# Allegro board 4CH-OEI-A1.brd
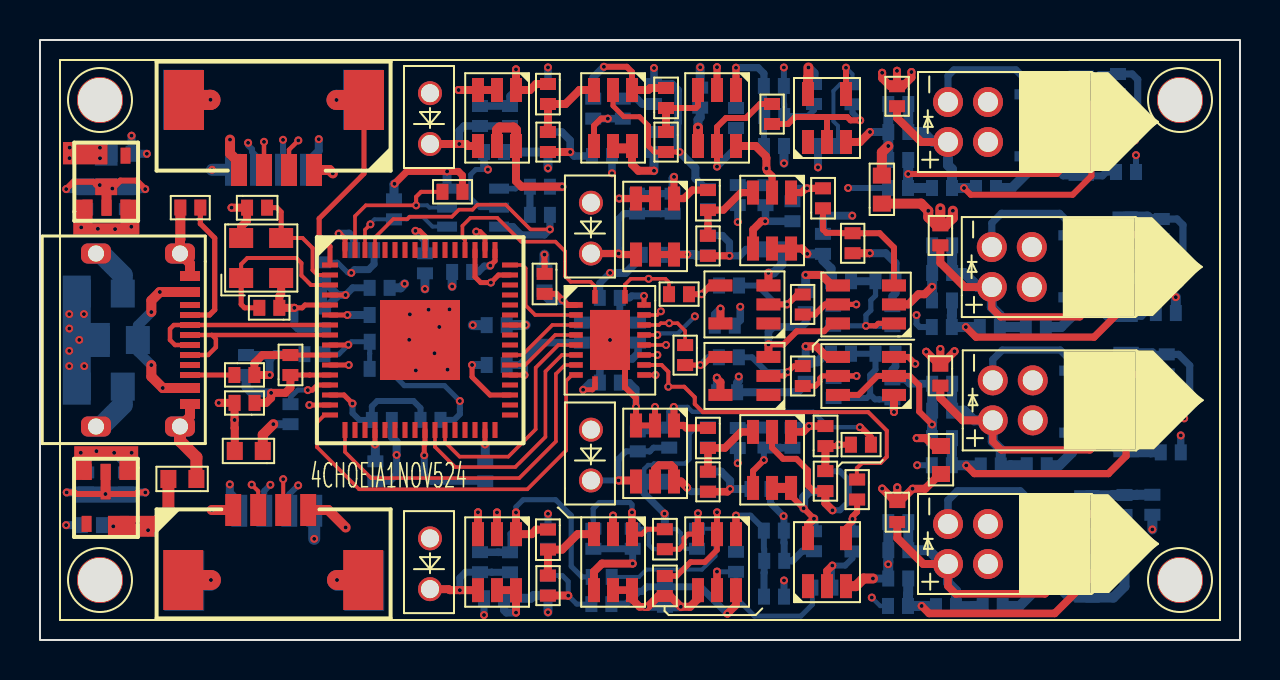
[diagram p0: board, top side]
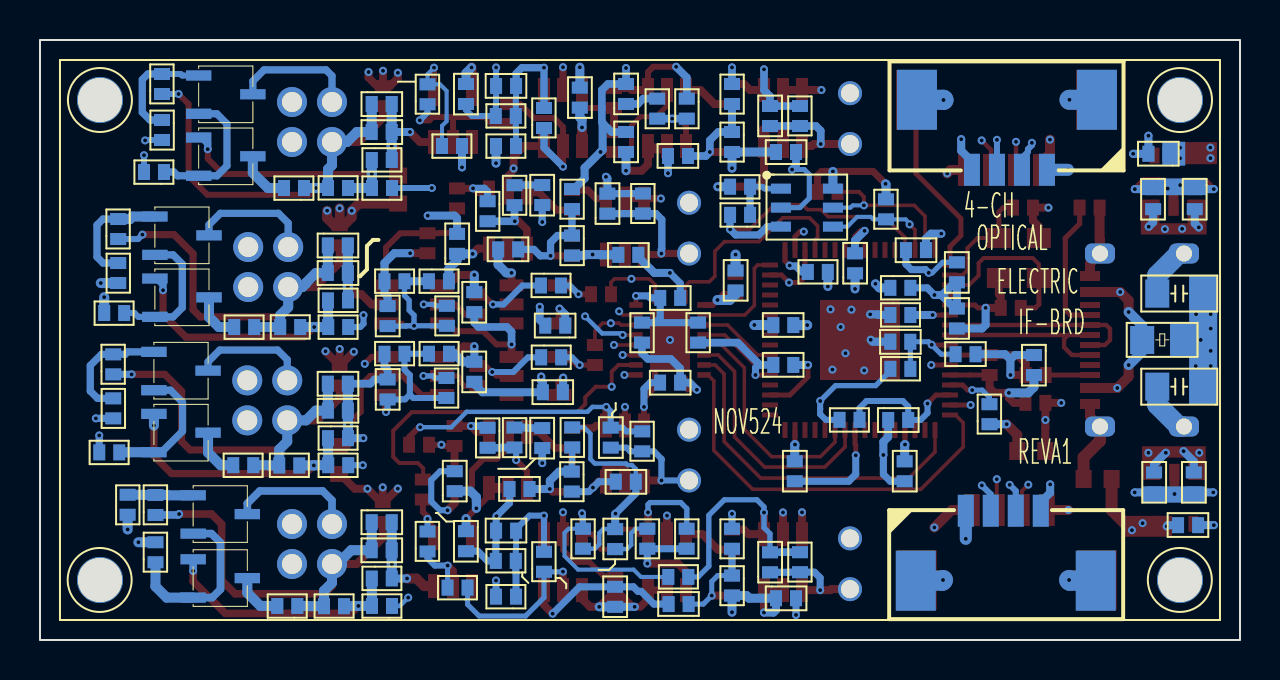
[diagram p1: board, bottom side, seen from below]

Outline 60 x 30 mm; copper layers: TOP, GND, VCC, BOTTOM. Coordinates in mm from the lower left corner of the outline.
Outline path: rectangle 0,0 60,30

## Design rules (mm)
constraint set DEFAULT: min track width 0.127
net group TXD_A: nets N931488 N931856 N931860 N931892 TXD_A
net group TXD_B: nets N932344 N932712 N932716 N932748 TXD_B
net group TXD_C: nets N932356 N932732 N932736 N932752 TXD_C
net group TXD_D: nets N931500 N931876 N931880 N931896 TXD_D

## Placement (name value [footprint] x y rotation side)
C1  0.1uF  [C0402_SMT]  25.4 27.8 270 top
C2  0.1uF  [C0402_SMT]  31.3 26.6 90 top
C3  0.1uF  [C0402_SMT]  39.15 21.58 90 top
C4  0.1uF  [C0402_SMT]  33.4 22.5 270 top
C5  27pF  [C0402_SMT]  10.35 21.62 0 top
C6  27pF  [C0402_SMT]  11.96 16.61 180 top
C7  4.7uF  [C0402_SMT]  12.52 13.25 90 top
C8  0.1uF  [C0402_SMT]  39.27 9.7 90 top
C9  0.1uF  [C0402_SMT]  33.4 10.6 270 top
C10  0.1uF  [C0402_SMT]  31.24 4.54 90 top
C11  0.1uF  [C0402_SMT]  25.4 5.52 270 top
C12  0.1uF  [C0402_SMT]  31.24 2.2 90 top
C13  0.1uF  [C0402_SMT]  36.2 27.7 0 bottom
C14  0.1uF  [C0402_SMT]  30.7 26.8 90 bottom
C15  0.1uF  [C0402_SMT]  38.7 27.8 270 bottom
C16  0.1uF  [C0402_SMT]  33.01 26.62 90 bottom
C17  10uF  [C0402_SMT]  43.41 26.8 180 bottom
C18  DNI  [C0402_SMT]  23.5 25.7 90 bottom
C19  10uF  [C0402_SMT]  43.41 25.4 180 bottom
C20  0.1uF  [C0402_SMT]  30.7 24.4 90 bottom
C21  0.1uF  [C0402_SMT]  23.2 24.4 180 bottom
C22  0.1uF  [C0402_SMT]  3.58 24.31 0 bottom
C23  0.1uF  [C0402_SMT]  27.6 24.2 0 bottom
C24  0.1uF  [C0402_SMT]  34.89 22.75 270 bottom
C25  0.1uF  [C0402_SMT]  4.34 22.55 270 bottom
C26  10uF  [C0402_SMT]  2.26 22.55 270 bottom
C27  DNI  [C0402_SMT]  31.63 21.32 90 bottom
C28  0.1uF  [C0402_SMT]  39.15 19.31 90 bottom
C29  10uF  [C0402_SMT]  45.61 19.73 180 bottom
C30  0.1uF  [C0402_SMT]  36.09 19.53 0 bottom
C31  0.1uF  [C0402_SMT]  16.7 19.49 180 bottom
C32  0.1uF  [C0402_SMT]  31.09 19.26 180 bottom
C33  0.1uF  [C0402_SMT]  19.25 18.33 90 bottom
C34  0.1uF  [C0402_SMT]  14.15 18.88 270 bottom
C35  10uF  [C0402_SMT]  45.61 18.35 180 bottom
C36  0.1uF  [C0402_SMT]  25.22 17.48 90 bottom
C37  22uF  [C0805_SMT]  1.94 17.32 0 bottom
C38  0.1uF  [C0402_SMT]  28.99 17.11 180 bottom
C39  0.1uF  [C0402_SMT]  38.28 17.39 270 bottom
C40  0.1uF  [C0402_SMT]  42.62 15.7 90 bottom
C41  4.7uF  [C0402_SMT]  14.15 15.57 90 bottom
C42  0.1uF  [C0402_SMT]  22.34 15.74 0 bottom
C43  0.1uF  [C0402_SMT]  33.74 15.72 0 bottom
C44  4.7uF  [C0402_SMT]  17.49 14.91 180 bottom
C45  0.1uF  [C0402_SMT]  13.22 14.29 0 bottom
C46  0.1uF  [C0402_SMT]  22.34 13.75 0 bottom
C47  0.1uF  [C0402_SMT]  10.3 14.25 270 bottom
C48  0.1uF  [C0402_SMT]  38.28 13.91 270 bottom
C49  0.1uF  [C0402_SMT]  29 12.87 180 bottom
C50  10uF  [C0402_SMT]  45.61 12.82 180 bottom
C51  22uF  [C0805_SMT]  1.94 12.67 0 bottom
C52  0.1uF  [C0402_SMT]  42.62 12.03 90 bottom
C53  0.1uF  [C0402_SMT]  33.86 12.39 0 bottom
C54  10uF  [C0402_SMT]  45.61 11.47 180 bottom
C55  0.1uF  [C0402_SMT]  17.59 11 180 bottom
C56  DNI  [C0402_SMT]  31.46 9.62 90 bottom
C57  0.1uF  [C0402_SMT]  34.89 10.6 270 bottom
C58  0.1uF  [C0402_SMT]  22.26 7.94 90 bottom
C59  0.1uF  [C0402_SMT]  16.77 7.94 90 bottom
C60  0.1uF  [C0402_SMT]  39.27 7.44 90 bottom
C61  0.1uF  [C0402_SMT]  31.21 7.91 180 bottom
C62  10uF  [C0402_SMT]  4.3 7.38 90 bottom
C63  0.1uF  [C0402_SMT]  2.31 7.38 90 bottom
C64  0.1uF  [C0402_SMT]  35.52 7.55 0 bottom
C65  10uF  [C0402_SMT]  43.41 5.89 180 bottom
C66  10uF  [C0402_SMT]  2.1 5.74 0 bottom
C67  0.1uF  [C0402_SMT]  36.2 5.47 0 bottom
C68  0.1uF  [C0402_SMT]  31.24 4.55 90 bottom
C69  0.1uF  [C0402_SMT]  38.7 5.44 270 bottom
C70  10uF  [C0402_SMT]  43.41 4.49 180 bottom
C71  DNI  [C0402_SMT]  23.5 3.39 90 bottom
C72  0.1uF  [C0402_SMT]  31.25 1.66 90 bottom
C73  0.1uF  [C0402_SMT]  23.2 2.09 180 bottom
C74  0.1uF  [C0402_SMT]  27.57 1.8 0 bottom
C75  10uF  [C0603_SMT]  11.14 9.45 180 top
C76  10uF  [C0603_SMT]  7.82 8.05 180 top
C77  22uF  [C0603_SMT]  42.09 21.82 90 top
C78  0.1uF  [C0402_SMT]  25.23 18.31 270 top
C79  22uF  [C0603_SMT]  45.05 8.3 90 top
F1  100mA  [R0805]  4.89 15 180 bottom
J1  SIP-1x4  [SMD-1D25-4P-DEG0]  13.7 23.5 180 top
J2  SIP-1x4  [SMD-1D25-4P-DEG0]  9.66 6.5 0 top
J3  SIP-1x4  [SMD-1D25-4P-DEG0]  9.65 23.51 0 bottom
J4  SIP-1x4  [SMD-1D25-4P-DEG0]  13.71 6.46 180 bottom
L1  2.2uH  [L0402_SMT]  17.48 17.61 180 bottom
L2  2.2uH  [L0402_SMT]  17.48 13.56 180 bottom
LD1  LaserDiode  [AXIAL_2D0_4P]  45.4 24.9 90 top
LD2  LaserDiode  [AXIAL_2D0_4P]  47.59 17.65 90 top
LD3  LaserDiode  [AXIAL_2D0_4P]  47.64 10.98 90 top
LD4  LaserDiode  [AXIAL_2D0_4P]  45.4 3.8 90 top
NOREF  -  [unnamed]  57 27 0 top
NOREF#2  -  [#2]  0 30 0 top
NOREF#3  -  [unnamed]  3 3 0 top
NOREF#4  -  [unnamed]  57 3 0 top
NOREF#5  -  [#2]  2.28 2.17 0 top
NOREF#6  -  [#2]  3 27 0 top
NOREF#7  -  [#2]  57 3 90 top
NOREF#8  -  [unnamed]  3 27 0 top
NOREF#9  -  [#2]  60 0 90 top
PD1  Photodiode  [PD-THR-2P]  19.5 24.8 90 top
PD2  Photodiode  [PD-THR-2P]  27.55 19.32 90 top
PD3  Photodiode  [PD-THR-2P]  27.55 7.98 90 top
PD4  Photodiode  [PD-THR-2P]  19.5 2.54 90 top
Q1  2SC1815  [SOT23-3]  52.5 28.7 270 bottom
Q2  2SC1815  [SOT23-3]  52.5 25.6 270 bottom
Q3  2SC1815  [SOT23-3]  54.69 21.65 270 bottom
Q4  2SC1815  [SOT23-3]  54.69 18.55 270 bottom
Q5  2SC1815  [SOT23-3]  54.74 14.88 270 bottom
Q6  2SC1815  [SOT23-3]  54.74 11.78 270 bottom
Q7  2SC1815  [SOT23-3]  52.78 7.71 270 bottom
Q8  2SC1815  [SOT23-3]  52.78 4.51 270 bottom
R1  DNP  [R0402_SMT]  42.85 27.69 270 top
R2  1K  [R0402_SMT]  36.6 26.8 270 top
R3  100K  [R0402_SMT]  25.39 25.4 270 top
R4  100K  [R0402_SMT]  31.3 25.4 270 top
R5  10K  [R0402_SMT]  20.12 22.41 0 top
R6  5.1K  [R0402_SMT]  8.02 21.62 180 top
R7  DNP  [R0402_SMT]  45.02 20.73 270 top
R8  100K  [R0402_SMT]  40.63 20.34 270 top
R9  100K  [R0402_SMT]  33.39 20.21 270 top
R10  0  [R0402_SMT]  31.45 17.29 0 top
R11  1K  [R0402_SMT]  38.14 16.27 90 top
R12  0  [R0402_SMT]  32.26 14.75 270 top
R13  5.1K  [R0402_SMT]  9.72 13.25 0 top
R14  DNP  [R0402_SMT]  45.02 13.72 270 top
R15  1K  [R0402_SMT]  38.14 12.7 90 top
R16  0  [R0402_SMT]  10.73 11.86 180 top
R17  DNP  [R0402_SMT]  40.55 9.76 0 top
R18  100K  [R0402_SMT]  39.27 8.45 270 top
R19  100K  [R0402_SMT]  33.39 8.41 270 top
R20  0  [R0402_SMT]  40.85 8.02 270 top
R21  DNP  [R0402_SMT]  42.86 6.9 270 top
R22  100K  [R0402_SMT]  25.39 3.22 270 top
R23  510  [R0402_SMT]  53.9 27.3 90 bottom
R24  4.99K  [R0402_SMT]  25.4 27.8 270 bottom
R25  DNP  [R0402_SMT]  40.62 26.79 90 bottom
R26  10K  [R0402_SMT]  29.14 27.07 270 bottom
R27  10K  [R0402_SMT]  27.66 27.07 270 bottom
R28  4.99K  [R0402_SMT]  37.21 26.2 180 bottom
R29  DNI  [R0402_SMT]  22 25.7 90 bottom
R30  DNP  [R0402_SMT]  34.8 25.6 90 bottom
R31  560  [R0402_SMT]  53.9 26 270 bottom
R32  4.99K  [R0402_SMT]  25.4 25.4 270 bottom
R33  0  [R0402_SMT]  38.9 24.7 0 bottom
R34  4.99K  [R0402_SMT]  36.2 24.7 0 bottom
R35  510  [R0402_SMT]  43.41 24 180 bottom
R36  51  [R0402_SMT]  53.8 23.4 0 bottom
R37  10K  [R0402_SMT]  24.5 22.66 0 bottom
R38  510  [R0402_SMT]  45.6 22.6 180 bottom
R39  51  [R0402_SMT]  46.8 22.6 0 bottom
R40  5.1K  [R0402_SMT]  42.4 22.6 0 bottom
R41  10K  [R0402_SMT]  36.27 22.74 270 bottom
R42  4.99K  [R0402_SMT]  33.4 22.55 270 bottom
R43  DNI  [R0402_SMT]  29.85 21.32 90 bottom
R44  10K  [R0402_SMT]  17.7 21.03 90 bottom
R45  10K  [R0402_SMT]  37.62 21.94 270 bottom
R46  2K  [R0402_SMT]  24.5 21.26 0 bottom
R47  510  [R0402_SMT]  56.09 20.05 90 bottom
R48  4.99K  [R0402_SMT]  33.4 20.23 270 bottom
R49  DNP  [R0402_SMT]  21.61 18.4 180 bottom
R50  560  [R0402_SMT]  56.09 18.85 270 bottom
R51  4.99K  [R0402_SMT]  42.78 17.94 180 bottom
R52  4.99K  [R0402_SMT]  40.55 17.94 180 bottom
R53  DNP  [R0402_SMT]  34.95 17.73 180 bottom
R54  510  [R0402_SMT]  45.6 16.98 180 bottom
R55  51  [R0402_SMT]  55.79 16.35 0 bottom
R56  12K  [R0402_SMT]  17.48 16.25 180 bottom
R57  DNP  [R0402_SMT]  39.66 16.71 270 bottom
R58  510  [R0402_SMT]  47.99 15.65 180 bottom
R59  51  [R0402_SMT]  49.29 15.65 0 bottom
R60  5.1K  [R0402_SMT]  44.59 15.65 0 bottom
R61  0  [R0402_SMT]  29.9 15.87 270 bottom
R62  DNP  [R0402_SMT]  27.1 15.87 270 bottom
R63  4.99K  [R0402_SMT]  42.78 14.31 180 bottom
R64  4.99K  [R0402_SMT]  40.55 14.31 180 bottom
R65  DNP  [R0402_SMT]  34.94 14.13 180 bottom
R66  510  [R0402_SMT]  56.34 13.28 90 bottom
R67  DNP  [R0402_SMT]  39.68 13.1 270 bottom
R68  560  [R0402_SMT]  56.34 12.08 270 bottom
R69  0  [R0402_SMT]  12.53 10.79 90 bottom
R70  10K  [R0402_SMT]  19.02 11.01 0 bottom
R71  4.99K  [R0402_SMT]  33.39 10.63 270 bottom
R72  10K  [R0402_SMT]  36.27 10.62 270 bottom
R73  10K  [R0402_SMT]  37.62 10.61 270 bottom
R74  510  [R0402_SMT]  45.6 10.09 180 bottom
R75  DNI  [R0402_SMT]  29.89 9.43 90 bottom
R76  51  [R0402_SMT]  56.04 9.38 0 bottom
R77  51  [R0402_SMT]  49.34 8.74 0 bottom
R78  510  [R0402_SMT]  48.04 8.73 180 bottom
R79  5.1K  [R0402_SMT]  44.59 8.74 0 bottom
R80  4.99K  [R0402_SMT]  33.41 8.42 270 bottom
R81  560  [R0402_SMT]  55.62 7.26 270 bottom
R82  510  [R0402_SMT]  54.23 6.25 90 bottom
R83  100K  [R0402_SMT]  32.85 5.56 270 bottom
R84  10K  [R0402_SMT]  29.63 5.56 270 bottom
R85  10K  [R0402_SMT]  27.67 5.56 270 bottom
R86  4.99K  [R0402_SMT]  25.4 5.56 270 bottom
R87  DNP  [R0402_SMT]  40.62 4.43 90 bottom
R88  51  [R0402_SMT]  54.23 3.89 90 bottom
R89  4.99K  [R0402_SMT]  37.21 3.96 180 bottom
R90  DNP  [R0402_SMT]  34.8 3.41 90 bottom
R91  DNI  [R0402_SMT]  22 3.39 90 bottom
R92  DNP  [R0402_SMT]  28.59 3.15 180 bottom
R93  510  [R0402_SMT]  43.41 3.07 180 bottom
R94  4.99K  [R0402_SMT]  25.4 3.22 270 bottom
R95  1K  [R0402_SMT]  38.62 2.62 0 bottom
R96  4.99K  [R0402_SMT]  36.2 2.17 0 bottom
R97  51  [R0402_SMT]  47.13 1.7 0 bottom
R98  510  [R0402_SMT]  45.8 1.69 180 bottom
R99  5.1K  [R0402_SMT]  42.4 1.7 0 bottom
U1  OPA357AIDBVR  [SOT-23-6-L2D9-W1D6-PD0D95-CD2D8-MM]  23.8 27.5 270 top
U2  OPA357AIDBVR  [SOT-23-6-L2D9-W1D6-PD0D95-CD2D8-MM]  29.6 27.5 270 top
U3  TLV3501AIDBVR  [SOT-23-6-L2D9-W1D6-PD0D95-CD2D8-MM]  34.8 27.5 270 top
U4  SN74AHC1G14DBVR  [SOT-23-5]  38.4 24.9 90 top
U5  XC6220B331MR-G  [SOT-25-5]  3.33 22.92 90 top
U6  OPA357AIDBVR  [SOT-23-6-L2D9-W1D6-PD0D95-CD2D8-MM]  37.55 22.37 270 top
U7  OPA357AIDBVR  [SOT-23-6-L2D9-W1D6-PD0D95-CD2D8-MM]  31.7 22.07 270 top
U8  SN74AHC1G14DBVR  [SOT-23-5]  36.42 15.83 180 top
U9  TLV3501AIDBVR  [SOT-23-6-L2D9-W1D6-PD0D95-CD2D8-MM]  42.7 15.83 180 top
U10  TYPE-C 16PIN 2MD(073)  [USB-TYPE-C-16P-SMD-HOR]  7.5 15 270 top
U11  FT4232HQ-REEL  [QFN-64-EP]  19 15 0 top
U12  TXS0108ERGYR  [VQFN-20]  28.5 15 270 top
U13  SN74AHC1G14DBVR  [SOT-23-5]  36.42 12.25 180 top
U14  TLV3501AIDBVR  [SOT-23-6-L2D9-W1D6-PD0D95-CD2D8-MM]  42.7 12.25 180 top
U15  OPA357AIDBVR  [SOT-23-6-L2D9-W1D6-PD0D95-CD2D8-MM]  31.7 10.73 270 top
U16  OPA357AIDBVR  [SOT-23-6-L2D9-W1D6-PD0D95-CD2D8-MM]  37.55 10.4 270 top
U17  XC6220B181MR  [SOT-25-5]  3.28 7.11 270 top
U18  OPA357AIDBVR  [SOT-23-6-L2D9-W1D6-PD0D95-CD2D8-MM]  23.8 5.29 270 top
U19  OPA357AIDBVR  [SOT-23-6-L2D9-W1D6-PD0D95-CD2D8-MM]  29.6 5.29 270 top
U20  TLV3501AIDBVR  [SOT-23-6-L2D9-W1D6-PD0D95-CD2D8-MM]  34.8 5.29 270 top
U21  SN74AHC1G14DBVR  [SOT-23-5]  38.4 2.69 90 top
U22  93LC56BT-I/OT  [SOT-23-6]  22.95 22.57 180 bottom
Y1  CRYSTAL-12.0MHz  [SMD2520-4P]  11.06 19.14 0 top

## Library data of the parts
C1-C79 = CAP NP
F1 = FUSE
J1-J4 = SIP-1x4
L1 L2 = INDUCTOR
LD1-LD4 = LaserDiode
PD1-PD4 = Photodiode
Q1-Q8 = 2SC1815
R1 R7 R14 R21 R36 R39 R55 R59 R76 R77 R88 R97 = R: signal model: DEFAULT_RESISTOR_40.000000OHM_2_1
R2-R6 R8-R13 R15-R20 R22 R24-R30 R32-R34 R37 R41-R46 R48 R49 R51-R53 R56 R57 R61-R65 R67 R69-R73 R75 R80 R83-R87 R89-R92 R94-R96 = R
R23 R31 R35 R38 R40 R47 R50 R54 R58 R60 R66 R68 R74 R78 R79 R81 R82 R93 R98 R99 = R: signal model: DEFAULT_RESISTOR_510.000000OHM_2_1
U1 U2 U6 U7 U15 U16 U18 U19 = OPA357AIDBVR
U3 U9 U14 U20 = TLV3501AIDBVR
U4 U8 U13 U21 = SN74AHC1G14DBVR
U5 = XC6220B331MR-G
U10 = USB-TYPE-C
U11 = FT4232HQ-REEL
U12 = TXS0108ERGYR
U17 = XC6220B181MR
U22 = 93LC56BT-I/OT
Y1 = CRYSTAL

## Footprints (pads in the part's own frame, mm; a bottom-side part is the same pattern mirrored in y, then rotated)
AXIAL_2D0_4P
  round 1.5 hole 1: 1(0,0) 2(2,0) 3(0,-2) 4(2,-2)
C0402_SMT
  rect 0.6x0.8 smd: 1(0,0) 2(1,0)
C0603_SMT
  rect 0.8x0.9 smd: 1(0,0) 2(1.4,0)
C0805_SMT
  rect 1.2x1.4 smd: 1(0,0) 2(2.2,0)
L0402_SMT
  rect 0.6x0.8 smd: 1(0,0) 2(1,0)
PD-THR-2P
  round 1.2 hole 0.9: 1(0,0) 2(2.54,0)
QFN-64-EP
  rect 0.8x0.25 smd: 1(-4.5,3.75) 2(-4.5,3.25) 3(-4.5,2.75) 4(-4.5,2.25) 5(-4.5,1.75) 6(-4.5,1.25) 7(-4.5,0.75) 8(-4.5,0.25) 9(-4.5,-0.25) 10(-4.5,-0.75) 11(-4.5,-1.25) 12(-4.5,-1.75) 13(-4.5,-2.25) 14(-4.5,-2.75) 15(-4.5,-3.25) 16(-4.5,-3.75) 33(4.5,-3.75) 34(4.5,-3.25) 35(4.5,-2.75) 36(4.5,-2.25) 37(4.5,-1.75) 38(4.5,-1.25) 39(4.5,-0.75) 40(4.5,-0.25) 41(4.5,0.25) 42(4.5,0.75) 43(4.5,1.25) 44(4.5,1.75) 45(4.5,2.25) 46(4.5,2.75) 47(4.5,3.25) 48(4.5,3.75)
  rect 0.25x0.8 smd: 17(-3.75,-4.5) 18(-3.25,-4.5) 19(-2.75,-4.5) 20(-2.25,-4.5) 21(-1.75,-4.5) 22(-1.25,-4.5) 23(-0.75,-4.5) 24(-0.25,-4.5) 25(0.25,-4.5) 26(0.75,-4.5) 27(1.25,-4.5) 28(1.75,-4.5) 29(2.25,-4.5) 30(2.75,-4.5) 31(3.25,-4.5) 32(3.75,-4.5) 49(3.75,4.5) 50(3.25,4.5) 51(2.75,4.5) 52(2.25,4.5) 53(1.75,4.5) 54(1.25,4.5) 55(0.75,4.5) 56(0.25,4.5) 57(-0.25,4.5) 58(-0.75,4.5) 59(-1.25,4.5) 60(-1.75,4.5) 61(-2.25,4.5) 62(-2.75,4.5) 63(-3.25,4.5) 64(-3.75,4.5)
  rect 4x4 smd: 65(0,0)
R0402_SMT
  rect 0.6x0.8 smd: 1(0,0) 2(1,0)
R0805
  rect 1.2x1.4 smd: 1(0,0) 2(2,0)
SMD2520-4P
  rect 1.2x1 smd: 1(-1,-1.04) 2(1,-1.04) 3(1,0.96) 4(-1,0.96)
SMD-1D25-4P-DEG0
  rect 0.8x1.6 smd: 1(0,0) 2(1.25,0) 3(2.5,0) 4(3.75,0)
  rect 2x3 smd: 5(6.5,-3.5) 6(-2.5,-3.5)
SOT23-3
  rect 0.51x1.27 smd: 1(0.476,0.434) 2(2.391,0.434) 3(1.415,3.142)
SOT-23-5
  rect 1.2x0.6 smd: 1(0,0) 2(0,-0.95) 3(0,-1.9) 4(2.4,-1.9) 5(2.4,0)
SOT-23-6
  rect 1x0.5 smd: 1(0,0) 2(0,-0.95) 3(0,-1.9) 4(2.6,-1.9) 5(2.6,-0.95) 6(2.6,0)
SOT-23-6-L2D9-W1D6-PD0D95-CD2D8-MM
  rect 1.2x0.6 smd: 1(0,0) 2(0,-0.95) 3(0,-1.9) 4(2.8,-1.9) 5(2.8,-0.95) 6(2.8,0)
SOT-25-5
  rect 0.8x0.5 smd: 1(-1.3,0.95) 2(-1.3,0) 3(-1.3,-0.95) 4(1.3,-0.95) 5(1.3,0.95)
unnamed
  round 2.3 hole 2.2 unplated: (0,0)
USB-TYPE-C-16P-SMD-HOR
  rect 0.5x1 smd: 1(-3.2,0) 2(-2.4,0) 11(2.4,0) 12(3.2,0)
  rect 0.3x1 smd: 3(-1.75,0) 4(-1.25,0) 5(-0.75,0) 6(-0.25,0) 7(0.25,0) 8(0.75,0) 9(1.25,0) 10(1.75,0)
  rrect 1x1.5 hole 0.8: 13(4.325,-0.5) 14(4.325,-4.7) 15(-4.325,-4.7) 16(-4.325,-0.5)
VQFN-20
  rect 0.68x0.28 smd: 1(-2.157,-0.75) 10(2.158,-0.75) 11(2.158,0.75) 20(-2.157,0.75)
  rect 0.28x0.68 smd: 2(-1.75,-1.7) 3(-1.25,-1.7) 4(-0.75,-1.7) 5(-0.25,-1.7) 6(0.25,-1.7) 7(0.75,-1.7) 8(1.25,-1.7) 9(1.75,-1.7) 12(1.75,1.7) 13(1.25,1.7) 14(0.75,1.7) 15(0.25,1.7) 16(-0.25,1.7) 17(-0.75,1.7) 18(-1.25,1.7) 19(-1.75,1.7)
  rect 3x2 smd: EPAD(0,0)

## Nets
GND: C5.1 C6.1 C7.2 C12.2 C13.2 C14.2 C15.2 C16.2 C17.2 C19.2 C20.2 C21.2 C22.2 C23.2 C24.2 C25.1 C26.1 C28.2 C29.2 C30.2 C31.1 C32.2 C33.1 C34.1 C35.2 C36.2 C37.2 C38.2 C39.2 C40.2 C41.1 C42.1 C43.2 C44.1 C45.1 C46.1 C47.1 C48.2 C49.1 C50.2 C51.2 C52.2 C53.2 C54.2 C55.1 C57.2 C58.1 C59.1 C60.2 C61.2 C62.1 C63.1 C64.2 C65.2 C66.1 C67.2 C68.2 C69.2 C70.2 C72.2 C73.2 C74.2 C75.1 C76.1 C77.2 C78.1 C79.2 J1.4 J1.5 J1.6 J2.4 J2.5 J2.6 J3.4 J3.5 J3.6 J4.4 J4.5 J4.6 PD1.2 PD2.2 PD3.2 PD4.2 R4.2 R6.2 R8.2 R13.2 R18.2 R24.1 R28.1 R31.2 R35.2 R36.2 R42.1 R50.2 R51.1 R54.2 R55.2 R56.1 R63.1 R68.2 R69.1 R71.1 R74.2 R76.2 R81.2 R83.2 R86.1 R88.2 R89.1 R93.2 U1.2(V-) U1.3 U2.2(V-) U3.2(V-) U3.6 U4.3 U5.2(VSS) U6.2(V-) U7.2(V-) U7.3 U8.3 U9.2(V-) U9.6 U10.1 U10.12 U10.13 U10.14 U10.15 U10.16 U11.1 U11.5 U11.10 U11.11 U11.15 U11.25 U11.35 U11.47 U11.51 U11.65 U12.11 U12.EPAD U13.3 U14.2(V-) U14.6 U15.2(V-) U15.3 U16.2(V-) U17.2(VSS) U18.2(V-) U18.3 U19.2(V-) U20.2(V-) U20.6 U21.3 U22.2 Y1.2 Y1.4
VBUS: C25.2 C26.2 C37.1 C51.1 C62.2 C63.2 F1.2 U5.1 U5.3 U17.1 U17.3
VBUSIN: F1.1 U10.2 U10.11(VBUS2)
VDD18: C7.1 C31.2 C46.2 C47.2 R16.1 R49.2 R62.2 U11.12 U11.37 U11.64
VDD33: C12.1 C15.1 C16.1 C20.1 C21.1 C22.1 C28.1 C32.1 C33.2 C36.1 C39.1 C42.2 C43.1 C48.1 C49.2 C53.1 C58.2 C59.2 C60.1 C61.1 C69.1 C72.1 C73.1 C77.1 C78.2 C79.1 J1.1 J2.1 J3.1 J4.1 L1.1 L2.1 R1.1 R5.2 R7.1 R14.1 R21.1 R32.2 R34.2 R37.2 R44.2 R48.2 R52.2 R61.2 R64.2 R70.2 R80.2 R94.2 R96.2 U1.5 U1.6 U2.5 U2.6 U3.4 U4.5 U5.5 U6.5 U6.6 U7.5 U7.6 U8.5 U9.4 U11.20 U11.31 U11.42 U11.50 U11.56 U12.2 U12.10 U13.5 U14.4 U15.5 U15.6 U16.5 U16.6 U18.5 U18.6 U19.5 U19.6 U20.4 U21.5 U22.6(VCC)
RXD_A: J2.3 R20.1 U12.13
RXD_B: J4.3 R33.1 U12.15
RXD_C: J3.3 R12.1 U12.17
RXD_D: J1.3 R10.1 U12.20
RXDA: U11.17 U12.8
RXDB: U11.27 U12.6
RXDC: U11.39 U12.4
RXDD: U11.52 U12.1
TXD_A: J2.2 R99.1 U12.12
TXD_B: J4.2 R79.1 U12.14
TXD_C: J3.2 R60.1 U12.16
TXD_D: J1.2 R40.1 U12.18
TXDA: U11.16 U12.9
TXDB: U11.26 U12.7
TXDC: U11.38 U12.5
TXDD: U11.48 U12.3
N00582: R5.1 U11.63 U22.5
N00604: R44.1 U11.62 U22.4
N00616: R46.2 U11.61 U22.3
N00760: R37.1 R46.1 U22.1
N01302: U10.6 U10.8 U11.8
N01314: U10.5 U10.7 U11.7
N01942: R49.1 U11.49(VREGOUT)
N02617: R56.2 U11.6
N02788: C55.2 R70.1 U11.14
N03863: C44.2 C45.2 L2.2 U11.9
N03880: C34.2 C41.2 L1.2 U11.4
N15178: C38.1 R61.1 R62.1 U12.19(VCCB)
N619829: R69.2 U11.13
N625108: C18.1 PD1.1 R29.1 U1.4
N625141: C1.1 C18.2 R29.2 U1.1
N797485: R26.2 R27.2 U2.4
N797493: C2.2 R27.1 U2.1
N797585: C13.1 R28.2 R30.2 R34.1 U3.1
N797593: R2.1 R30.1 U3.5
N797877: C2.1 R4.1 U3.3
N797953: C1.2 R3.1 U2.3
N798113: C23.1 R3.2 R24.2 R32.1
N804959: C14.1 R26.1
N809789: R2.2 R25.1 U4.2
N814486: R25.2 R33.2 U4.4(Y)
N820703: C68.1 R84.1
N820707: R84.2 R85.2 U19.4
N820719: C10.2 R85.1 U19.1
N820731: C67.1 R89.2 R90.2 R96.1 U20.1
N820747: C71.1 PD4.1 R91.1 U18.4
N820755: C11.1 C71.2 R91.2 R92.2 U18.1
N820875: R90.1 R95.1 U20.5
N821237: R87.1 R95.2 U21.2
N821249: R20.2 R87.2 U21.4(Y)
N821327: C10.1 R83.1 R92.1 U20.3
N821379: C11.2 R22.1 U19.3
N821555: C74.1 R22.2 R86.2 R94.1
N830568: C66.2 C75.2 C76.2 R16.2 U17.5
N884584: R6.1 U10.4
N886048: R13.1 U10.10
N887669: C5.2 U11.2 Y1.3
N887689: C6.2 U11.3 Y1.1
N909852: C9.1 C56.2 R17.2 R75.2 U15.1
N909860: C8.1 R17.1 R18.1 U14.3
N909984: C57.1 R72.1
N909988: R72.2 R73.2 U16.4
N910000: C8.2 R73.1 U16.1
N910012: C52.1 R63.2 R64.1 R67.2 U14.1
N910028: C56.1 PD3.1 R75.1 U15.4
N910156: R15.1 R67.1 U14.5
N910546: R15.2 R65.1 U13.2
N910558: R12.2 R65.2 U13.4(Y)
N910688: C9.2 R19.1 U16.3
N910864: C64.1 R19.2 R71.2 R80.1
N911060: C24.1 R41.1
N911064: R41.2 R45.2 U6.4
N911076: C3.2 R45.1 U6.1
N911088: C40.1 R51.2 R52.1 R57.2 U9.1
N911104: C27.1 PD2.1 R43.1 U7.4
N911112: C4.1 C27.2 R43.2 U7.1
N911232: R11.1 R57.1 U9.5
N911614: R11.2 R53.1 U8.2
N911626: R10.2 R53.2 U8.4(Y)
N911704: C3.1 R8.1 U9.3
N911756: C4.2 R9.1 U6.3
N911932: C30.1 R9.2 R42.2 R48.1
N931488: C65.1 C70.1 LD4.1 R21.2 R82.1 R97.1 R98.1
N931500: C17.1 C19.1 LD1.1 R1.2 R23.1 R38.1 R39.1
N931812: LD4.2 Q7.3
N931828: LD1.2 Q1.3
N931856: Q8.1 R93.1 R98.2 R99.2
N931860: Q8.3 R97.2
N931876: Q2.1 R35.1 R38.2 R40.2
N931880: Q2.3 R39.2
N931892: Q7.1 R81.1 R82.2
N931896: Q1.1 R23.2 R31.1
N932124: Q7.2(E) Q8.2(E) R88.1
N932164: Q1.2(E) Q2.2(E) R36.1
N932344: C50.1 C54.1 LD3.1 R14.2 R66.1 R77.1 R78.1
N932356: C29.1 C35.1 LD2.1 R7.2 R47.1 R58.1 R59.1
N932668: LD3.2 Q5.3
N932684: LD2.2 Q3.3
N932712: Q6.1 R74.1 R78.2 R79.2
N932716: Q6.3 R77.2
N932732: Q4.1 R54.1 R58.2 R60.2
N932736: Q4.3 R59.2
N932748: Q5.1 R66.2 R68.1
N932752: Q3.1 R47.2 R50.1
N932980: Q5.2(E) Q6.2(E) R76.1
N933020: Q3.2(E) Q4.2(E) R55.1

Pads without a net: LD1 3 4; LD2 3 4; LD3 3 4; LD4 3 4; U4 1; U5 4; U8 1; U10 3 9; U11 18 19 21 22 23 24 28 29 30 32 33 34 36 40 41 43 44 45 46 53 54 55 57 58 59 60; U13 1; U17 4; U21 1

## Via types
v1: diameter 0.4, hole 0.2, TOP to BOTTOM, 252 vias

## Routing (per net, layer and track width the routed paths; a pad name or vN(x,y) marks a point on that pad's centre or on a via; arc(x,y) is an arc through that point)
GND: length 255.8
  TOP w0.25: J1.6 16.2,23.32 13.96,21.08 13.96,20.21 14.5,19.67 U11.1 ; v1(21.6,13.75) 21.6,13.15 22.5,12.25 U11.35 ; U2.2 28.65,26.71 29.19,26.16 29.97,26.16 30.43,25.71 30.43,24.68 30.71,24.4 R4.2 ; U11.5 13.25,16.75 13.11,16.61 v1(12.72,16.61) ; U11.47 22.93,18.25 v1(22.55,17.87) 22.03,17.87 21.75,18.16 U11.51 ; v1(19.21,9.23) 19.21,9.75 19.25,9.79 U11.25 ; U11.15 v1(13.47,11.75) ; C7.2 13.11,14.25 13.11,14.25 U11.10 ; U11.11 v1(15.44,13.75)
  TOP w0.26: R4.2 v1(31.98,24.4)
  TOP w0.28: C12.2 31.83,3.2 32.53,3.9 33.25,3.9 33.85,4.5 U20.2
  TOP w0.3: v1(1.31,22.55) 1.68,22.91 2.67,22.91 2.83,22.75 v1(2.99,22.75) ; R18.2 38.68,7.45 38.4,7.73 38.4,8.48 37.82,9.06 37.16,9.06 36.6,9.61 U16.2 ; U20.2 v1(33.85,6.39) ; U14.6 40.92,12.25 41.87,13.2 U14.2 43.49,13.2 43.96,12.73 43.96,11.42 v1(44.6,10.78) ; C78.1 25.23,18.87 25.22,18.88 v1(25.22,19.27) ; v1(28.5,15) 29.25,14.25 U12.11 29.25,12.64 29.8,12.09 v1(29.8,11.65) 29.8,10.73 U15.2 v1(30.75,11.65) ; U9.6 39.6,15.83 39.21,15.44 37.84,15.44 37.18,14.78 v1(36.42,14.78) ; v1(1.33,7.38) 1.73,7.38 1.81,7.3 v1(3.27,7.3) 4.8,7.3 4.88,7.38 v1(5.27,7.38) ; v1(3.62,22.57) 4.01,22.97 4.84,22.97 v1(5.26,22.55)
  TOP w0.36: v1(28.96,22.07) U7.2 ; v1(36.32,23.58) 36.32,23.48 36.6,23.2 U6.2 ; U3.2 v1(33.85,28.64)
  TOP w0.38: v1(34.37,1.32) 34.8,1.75 U20.6
  TOP w0.4: v1(41.5,25.4) 41,24.9 U4.3 ; v1(44.61,17.66) 44.23,17.29 43.93,17.29 43.42,16.78 U9.2 ; C7.2 11.13,14.25 10.72,13.84 R13.2 v1(11.48,13.25) ; U1.2 U1.3 v1(20.93,27.5) ; U19.2 v1(28.65,6.22) ; v1(39.62,6.49) 39.27,6.84 R18.2 ; Y1.2 12.06,17.29 11.96,17.2 C6.1 v1(12.72,16.61) ; R8.2 v1(41.49,19.34) ; v1(9.58,21.62) C5.1 10.35,20.97 10.06,20.67 Y1.4 ; U3.6 35.78,24.7 36.3,24.18 36.3,24.13 36.32,24.11 v1(36.32,23.58) ; v1(43.83,10.09) 44.29,10.09 44.68,9.7 C79.2 ; U13.3 v1(36.42,14.78) ; U18.3 v1(21.9,6.39) ; 36.42,17.73 v1(36.42,18.36) ; U18.2 v1(22.85,6.38)
  TOP w0.5: v1(42.41,24.7) 42.09,24.38 C77.2 ; U10.12 7.5,11.18 U10.13 ; v1(41.65,3.07) 41.17,3.07 40.79,2.69 U21.3 ; U10.1 7.5,18.82 U10.16 7,20.02 7.02,20.03 R6.2 ; v1(15.28,5.63) 14.41,6.5 J2.4 ; J1.4 9.95,23.87 9.5,24.32 v1(9.5,25.02) ; C75.1 11.14,10.26 v1(11.67,10.79)
  TOP w0.6: C76.1 7.82,9.14 7,9.95 U10.13
  TOP w1: J1.6 v1(14.82,27) ; J2.6 v1(8.55,3) ; v1(8.53,27.01) 8.49,27.01 8.48,27 J1.5 ; J2.5 v1(14.85,3)
  BOTTOM w0.127: R54.2 44.6,16.99
  BOTTOM w0.22: R83.2 32.26,4.56 32.03,4.79 32.03,5.34 31.83,5.55 C68.2 ; C61.2 30.21,8.55 30.41,8.75 30.62,8.75 30.7,8.82 32.26,8.82 32.48,9.04 32.48,10.31 32.8,10.63 R71.1
  BOTTOM w0.25: U22.2 22,21.62 21.53,22.09 21.53,23.27 21.78,23.52 v1(22.4,23.52)
  BOTTOM w0.26: v1(15.56,18.36) 15.39,18.36 14.87,18.88 C34.1
  BOTTOM w0.3: v1(37.2,28.63) C13.2 37.2,26.81 37.21,26.79 R28.1 38.4,26.2 38.7,26.5 C15.2 ; R31.2 54.73,25 v1(54.75,24.98) ; v1(39.62,6.49) 40,6.49 40.44,6.93 40.44,7.99 39.99,8.44 C60.2 ; R36.2 v1(54.8,24.24)
  BOTTOM w0.35: v1(29.8,11.65) 29.8,12.55 29.49,12.87 C49.1 ; C64.2 36.52,6.85 v1(37.18,6.19) 37.18,6.12 37.2,6.1 C67.2 37.2,4.88 37.21,4.86 R89.1 37.63,3.96 38.11,4.44 C69.2 ; v1(28.5,18.35) 27.99,17.84 C38.2 ; C58.1 19.56,7.94 19.21,8.29 v1(19.21,9.23) ; C73.2 v1(22.2,1.25) ; v1(17.83,9.25) 17.83,8.29 17.48,7.94 C59.1 ; v1(31.23,6.32) 30.21,7.33 C61.2 ; C31.1 16.7,18.79 16.43,18.52 15.73,18.52 v1(15.56,18.36) ; v1(34.37,1.32) 33.02,2.66 C72.2 30.33,2.66 30.1,2.43 29.94,2.43 29.31,1.8 C74.2 ; R86.1 v1(25.4,6.31)
  BOTTOM w0.36: R76.2 v1(57.04,10.23) ; R68.2 v1(57.21,11.08) ; C24.2 v1(34.89,20.9)
  BOTTOM w0.38: R63.1 42.78,13.67 42.62,13.52 C52.2 43.27,13.03 43.48,12.82 C50.2 ; v1(22.4,23.52) 22.2,23.72 C21.2 ; C57.2 v1(34.89,8.84) ; R24.1 v1(25.4,28.63) ; v1(36.42,14.78) 36.42,15.42 36.66,15.65 38.08,15.65 38.28,15.86 C39.2 ; R74.2 v1(43.83,10.09) ; C23.2 v1(28.6,23.34) ; v1(35.01,16.66) 35.01,15.99 C43.2 ; v1(30.7,28.6) C14.2 31.61,27.8 31.91,27.5 31.91,25.88 31.42,25.4 C20.2
  BOTTOM w0.4: R56.1 18.07,16.25 18.1,16.28 v1(18.49,16.28) ; R42.1 33.3,22.55 32.77,23.08 32.77,23.61 v1(31.98,24.4) 31.87,24.51 31.87,25.85 ; R69.1 v1(11.67,10.79) ; C40.2 42.62,17.19 42.78,17.34 R51.1 42.78,18.85 42.28,19.34 v1(41.49,19.34) ; C41.1 12.9,15.57 12.72,15.76 v1(12.72,16.61) ; C25.1 v1(5.26,22.55) ; 11.48,14.02 11.75,14.29 C45.1 ; 11.48,14.02 v1(11.48,13.25) ; 11.48,14.02 11.25,14.25 C47.1 ; C68.2 31.24,6.3 v1(31.23,6.32) ; C28.2 39.15,21.09 39.27,21.21 v1(40.61,21.21) ; C62.1 v1(5.27,7.38) ; v1(28.5,18.35) 29.28,18.35 30.09,19.16 C32.2 ; C63.1 v1(1.33,7.38) ; v1(9.49,7.78) 9.49,7.36 9.96,6.89 J4.4 ; v1(5.34,24.31) C22.2 v1(4.58,25.21) ; C26.1 v1(1.31,22.55) ; C48.2 38.28,12.79 37.88,12.39 C53.2 34.86,12.87 34.94,12.95 v1(34.94,13.17) ; R93.2 v1(41.65,3.07) ; J3.4 13.4,23.93 13.94,24.47 v1(13.94,25.04) ; C46.1 v1(21.6,13.75) ; v1(18.46,15.01) 18.36,14.91 C44.1 ; C19.2 v1(41.5,25.4) ; C55.1 17.59,10.15 17.83,9.91 v1(17.83,9.25) ; C66.1 v1(1.31,5.74)
  BOTTOM w0.45: C16.2 v1(33.01,28.64) ; C30.2 37.09,18.77 36.68,18.36 v1(36.42,18.36) ; C33.1 v1(19.25,17.55)
  BOTTOM w0.5: R35.2 42.41,24.59 42.41,24.6 v1(42.41,24.7) C19.2 C17.2 ; R88.2 v1(55.08,4.89) ; R81.2 v1(55.62,5.53) ; C29.2 C35.2 v1(44.61,17.66) 44.61,17.58 44.6,17.58 44.6,16.99 ; R50.2 v1(56.96,17.85) ; R93.2 v1(42.41,3.79) 42.41,3.89 42.41,3.9 C70.2 C65.2 ; C42.1 v1(21.64,15.74) ; R55.2 v1(56.79,17.14) ; C36.2 v1(25.22,19.27) ; R74.2 v1(44.6,10.78) 44.6,10.87 44.61,10.88 C54.2 C50.2
  BOTTOM w1: U10.15 3.05,19.32 4.14,18.24 C37.2 ; U10.14 3.05,10.68 4.14,11.76 C51.2 ; v1(8.55,3) 8.51,2.96 J4.5 ; J3.5 14.84,27.01 v1(14.82,27) ; J3.6 v1(8.53,27.01) ; v1(14.85,3) 14.89,2.96 J4.6
  vias: v1(18.79,13.48) v1(19.43,16.51) v1(19.73,14.34) v1(19.97,15.65) v1(20.38,13.52) v1(20.47,16.53)
VBUS: length 18
  TOP w0.127: U17.3 2.33,9.07 v1(2.04,9.36) ; U5.1 2.38,20.95 v1(2.06,20.63) ; v1(4.57,20.66) 4.28,20.95 U5.3 ; U17.1 4.23,9.01 v1(4.58,9.36)
  VCC w0.127: v1(2.06,20.63) 1.47,20.04 v1(1.47,16.3) ; v1(1.47,13.7) 1.47,9.93 v1(2.04,9.36)
  BOTTOM w0.4: v1(2.82,9.44) 2.31,8.93 C63.2 ; C62.2 4.3,8.77 v1(3.71,9.36) ; v1(2.06,20.63) 2.26,20.83 C26.2 ; C25.2 4.34,20.88 v1(4.57,20.66)
  vias: v1(1.47,15.57) v1(1.47,14.46) v1(1.97,15) v1(2.2,16.3) v1(2.21,13.7) v1(2.89,20.56) v1(3.75,20.54)
VBUSIN: length 8.6
  TOP w0.5: v1(5.57,13.75) 5.57,13.17 v1(6.14,12.6) U10.11 ; v1(5.57,16.4) 5.57,16.98 v1(5.99,17.4) U10.2
  BOTTOM w0.5: v1(5.57,13.75) 4.89,14.42 F1.1 4.89,15.72 v1(5.57,16.4)
VDD18: length 51
  TOP w0.25: v1(14.94,20.32) 15,20.32 15.25,20.07 U11.64 ; U11.37 v1(24.23,13.25) ; U11.12 13.49,13.25 13.49,13.25 C7.1
  TOP w0.4: C7.1 12.52,12.61 12.27,12.36 v1(11.55,12.36) 11.55,12.11 11.3,11.86 R16.1
  VCC w0.127: 18.8,14.35 18.19,14.35 18.14,14.39 16.75,14.39 ; v1(11.55,12.36) 10.64,12.36 10.08,12.91 10.08,17.14 11.73,18.8 11.98,18.8 13.55,20.37 14.78,20.37 14.86,20.45 14.94,20.37 v1(14.94,20.32) 15.21,20.04 15.21,19.91 16.5,18.62 16.5,14.28 16.52,14.26 16.52,13.99 16.75,13.76
  VCC w0.4: 22.77,13.4 22.81,13.44 23.51,13.44 23.7,13.25 v1(24.23,13.25) ; 22.77,13.4 22.07,12.69 21.95,12.69 21.89,12.75 20.75,12.75 20.71,12.72 19.16,12.72 19.12,12.68 18.46,12.68 18.38,12.75 17.75,12.75 16.75,13.76 ; 22.77,13.4 22.77,15.97 21.71,17.03 21.29,17.03 20.92,17.4 20.88,17.4 v1(20.61,17.68)
  BOTTOM w0.35: 24,13.75 24.09,13.75 24.23,13.61 v1(24.23,13.25)
  BOTTOM w0.38: R62.2 25.12,14.87 24,13.75 C46.2
  BOTTOM w0.4: v1(14.94,20.32) 15.45,20.32 15.71,20.06 C31.2
  BOTTOM w0.45: v1(11.55,12.36) 10.59,12.36 10.3,12.64 C47.2 ; R49.2 v1(20.61,17.68)
VDD33: length 264.3
  TOP w0.25: U12.10 27.75,12.64 27.62,12.51 v1(27.16,12.51) ; U11.20 v1(16.75,9.77) ; v1(21.81,20.42) 22,20.42 22.25,20.17 U11.50 ; U11.56 19.25,20.19 18.98,20.46 v1(18.77,20.46) ; U11.42 v1(24.28,15.75) ; U11.31 v1(22.25,9.77)
  TOP w0.3: v1(38.7,6.07) v1(38.18,6.58) 37.55,7.21 37.55,7.6 ; U12.2 26.37,16.75 v1(26.12,17) 25.82,17.31 C78.2
  TOP w0.35: v1(17.72,22.81) 18.34,23.43 v1(20.35,23.43) 20.92,23.43 21.12,23.23 R5.2
  TOP w0.36: v1(32.37,19.27) U7.6 U7.5
  TOP w0.38: v1(30.27,1.66) 29.98,1.66 29.6,2.04 U19.6 U19.5
  TOP w0.4: v1(42.11,7.57) 42.78,6.9 R21.1 ; C79.1 45,8.3 44.26,7.56 v1(43.63,7.56) 42.96,6.9 R21.1 ; v1(44.31,14.41) 45,13.72 R14.1 ; U6.5 U6.6 38.1,19.57 v1(38.37,19.31) ; v1(30.7,23.46) 29.92,23.46 29.6,23.78 U2.6 ; U14.4 39.35,14.15 38.82,14.68 v1(38.28,14.68) ; 39.9,17.73 39.6,17.73 39.08,18.25 v1(38.28,18.25) ; v1(32.35,7.62) 32.05,7.93 U15.6 31.7,8.59 31.56,8.73 30.94,8.73 30.75,8.54 U15.5 ; R1.1 43.14,27.69 43.57,28.12 v1(43.57,28.4) ; R1.1 42.51,27.69 42.11,28.09 v1(42.11,28.36) ; R1.1 v1(42.85,28.46) ; R14.1 45.72,14.43 v1(45.72,14.44) ; R14.1 v1(45.02,14.55) ; v1(38.7,6.07) 38.4,5.77 U21.5 ; R21.1 v1(42.86,7.63) ; U18.5 U18.6 v1(23.8,1.37) ; U1.6 23.8,22.94 24.08,22.66 v1(26.11,22.66) ; U8.5 v1(34.02,16.57) ; v1(33.84,13.11) 33.84,13.07 34.02,12.89 U13.5 ; U20.4 32.9,2.06 32.5,1.66 v1(32.04,1.66) 31.5,2.2 C12.1 30.93,2.2 30.39,1.66 v1(30.27,1.66)
  TOP w0.5: U2.6 29.48,24.58 28.77,24.58 U2.5 ; U3.4 v1(32.9,25.63) ; U1.5 22.85,25.5 22.98,25.62 23.67,25.62 23.8,25.5 U1.6 ; U4.5 38.4,28.11 38.42,28.13 v1(38.42,28.62) ; J2.1 v1(8.59,6.5) ; 36.6,7.6 37.55,7.6 ; J1.1 14.47,23.5 v1(14.64,23.33) ; R7.1 v1(45.02,21.59) ; R7.1 44.81,20.73 44.41,21.13 v1(44.41,21.46) 44.05,21.82 C77.1 ; R7.1 45.28,20.73 45.64,21.1 v1(45.64,21.46)
  VCC w0.127: v1(32.9,25.63) 31.18,27.34 26.92,27.34 ; v1(32.9,25.63) 33.27,25.26 36.49,25.26 ; v1(32.9,25.63) 32.55,25.28 31.54,25.28 30.7,24.44 v1(30.7,23.46) 30.7,23.07 30.44,22.81 30.44,22.38 32.37,20.45 v1(32.37,19.27) ; 34.29,15.49 37.48,15.49 v1(38.28,14.68) ; 34.29,15.49 34.34,15.44 34.34,13.51 34.22,13.39 34.12,13.39 v1(33.84,13.11) ; 34.29,15.49 34.02,15.76 v1(34.02,16.57) ; v1(18.77,20.46) 18.77,20.42 19.04,20.15 19.05,20.15 19.06,20.14 21.53,20.14 v1(21.81,20.42) ; v1(18.77,20.46) 18.49,20.73 18,20.73 17.72,20.46 ; v1(18.77,20.46) 18.49,20.18 18.49,20.13 18.27,19.9 18.23,19.9 v1(18.23,17.81) ; 7.48,23.96 7.48,24.75 11.2,28.47 21.72,28.47 22.85,27.34 26.92,27.34 ; 7.48,23.96 6.82,23.3 ; 7.48,23.96 8.92,23.96 10.55,22.33 16.07,22.33 16.16,22.43 17.34,22.43 v1(17.72,22.81) 17.72,20.46 ; v1(25.4,1.39) 25.12,1.66 25.12,1.71 24.57,2.26 24.57,2.59 25.68,3.7 27.5,3.7 29.54,1.66 v1(30.27,1.66) ; 26.92,27.34 25.8,26.22 25.8,25.94 25.4,25.54 v1(25.4,23.59) 25.4,22.64 25.43,22.66 v1(26.11,22.66) ; 38.42,27.59 38.42,27.19 36.49,25.26 ; 38.42,27.59 v1(38.42,28.62) ; 38.42,27.59 38.5,27.67 41.61,27.67 41.83,27.89 41.83,28.08 v1(42.11,28.36) ; 17.72,20.46 17.7,20.44 ; v1(1.48,24.09) 1.48,24.1 v1(1.48,24.62) 2.6,24.62 2.61,24.61 v1(3,24.61) 3,24.09 v1(3,24.09) 3.49,24.09 ; v1(30.27,1.66) 30.54,1.94 30.66,1.94 32.02,3.3 32.02,6.67 32.35,7 v1(32.35,7.62) ; v1(30.27,1.66) v1(32.04,1.66) ; v1(38.28,18.25) 38.28,18.64 38.37,18.72 v1(38.37,19.31) 39.47,20.41 42.33,20.41 42.36,20.44 42.36,21.65 42.88,22.17 42.88,22.69 41.06,24.5 37.86,24.5 v1(37.2,23.84) 37.2,24.55 36.49,25.26 ; v1(37.2,2.98) 37.2,4.75 38.24,5.79 38.42,5.79 v1(38.7,6.07)
  VCC w0.3: 6.82,23.3 6.71,23.4 4.17,23.4 3.49,24.09
  VCC w0.4: v1(24.28,15.75) 24.97,15.75 25.97,16.75 27.16,15.57 v1(27.16,12.51) 24.99,12.51 v1(22.25,9.77) 21.8,10.22 17.2,10.22 v1(16.75,9.77)
  BOTTOM w0.26: L2.1 17.48,13.46 18.22,12.72 20.22,12.72 v1(20.99,11.95)
  BOTTOM w0.3: v1(20.99,11.95) 20.99,11.56 21,11.56 21,11.29 20.71,11.01 R70.2
  BOTTOM w0.35: R96.2 v1(37.2,2.98) ; C61.1 32.06,7.91 v1(32.35,7.62) 32.55,7.42 R80.2
  BOTTOM w0.38: v1(34.02,16.57) 33.74,16.28 C43.1 ; v1(27.16,12.51) 27.51,12.87 C49.2 28,13.59 28.46,14.05 29.61,14.05 29.9,14.34 R61.2
  BOTTOM w0.4: v1(18.77,20.46) 19.25,19.98 C33.2 ; C73.1 23.2,1.5 23.32,1.37 v1(23.8,1.37) ; C53.1 33.84,12.4 v1(33.84,13.11) ; C48.1 v1(38.28,14.68) ; v1(30.27,1.66) C72.1
  BOTTOM w0.45: C58.2 22.26,9.76 v1(22.25,9.77) ; C72.1 v1(32.04,1.66) ; C69.1 v1(38.7,6.07) ; v1(38.18,6.58) 38.18,6.97 38.18,6.98 38.18,7.14 38.48,7.44 C60.1 ; C21.1 R32.2 v1(25.4,23.59) ; C73.1 24.54,2.09 24.68,2.22 R94.2 v1(25.4,1.39) ; C39.1 v1(38.28,18.25) ; R44.2 17.7,22.78 v1(17.72,22.81) ; v1(37.2,23.84) R34.2 ; v1(38.37,19.31) C28.1 39.15,18.98 39.55,18.58 R52.2 ; C20.1 v1(30.7,23.46) ; C16.1 33.01,26.13 32.9,26.02 v1(32.9,25.63) ; R48.2 32.81,19.23 32.76,19.27 v1(32.37,19.27) 31.98,19.27 31.96,19.26 C32.1 ; L1.1 18.03,17.61 v1(18.23,17.81) ; v1(16.75,9.77) 16.77,9.75 C59.2 ; R37.2 v1(26.11,22.66) ; v1(38.42,28.62) 38.7,28.35 C15.1 ; R64.2 39.28,14.31 38.88,13.91 C48.1 ; U22.6 v1(20.35,23.43)
  BOTTOM w0.5: v1(26.12,17) 25.52,17 25.22,17.3 C36.1 ; C42.2 23.83,15.74 23.84,15.75 v1(24.28,15.75)
  BOTTOM w0.6: J4.1 v1(13.71,5.06) ; J3.1 v1(8.6,23.51)
RXD_A: length 44.5
  TOP w0.2: R20.1 40.84,8.04 40.84,8.59 41.1,8.85 42.03,8.85 42.34,9.16 42.34,10.46 41.41,11.39 33.14,11.39 32.74,11.8 32.74,12.14 32.21,12.66 v1(31.42,12.66) 31.42,13.41 31.08,13.75 U12.13 ; J2.3 v1(12.16,8.04)
  VCC w0.127: v1(12.16,8.04) 12.16,7.16 12.56,6.76 13.54,6.76 13.95,7.16 20.73,7.16 21.45,7.89 24.95,7.89 26.52,9.45 30.76,9.45 32.27,10.96 32.27,12.2 31.81,12.66 v1(31.42,12.66)
RXD_B: length 47.8
  TOP w0.18: U12.15 v1(31.3,14.75)
  VCC w0.127: v1(11.52,7.76) 11.52,8.59 11.75,8.82 13.3,8.82 13.77,8.35 20.22,8.35 20.82,8.95 24.03,8.95 25.04,9.96 25.04,11.2 25.68,11.85 28.19,11.85 29.11,12.77 29.11,14.35 29.51,14.75 v1(31.3,14.75) 31.69,14.75 32.05,15.11 32.05,17.46 32.61,18.01 35.55,18.01 35.98,17.59 36.65,17.59 37.45,18.39 37.45,19.57 39.77,21.89 40.87,21.89 41.33,22.36 41.33,23.16 40.86,23.63 v1(38.9,23.63)
  BOTTOM w0.3: v1(11.52,7.76) 11.21,7.45 J4.3
  BOTTOM w0.4: R33.1 v1(38.9,23.63)
RXD_C: length 28.4
  TOP w0.18: U12.17 30.95,15.75 31.04,15.84 v1(31.46,15.84) 31.88,15.84 32.26,15.46 R12.1
  VCC w0.127: v1(12.15,25.01) 12.15,24.62 12.31,24.46 18.09,24.46 20.24,22.31 22.07,22.31 24,20.38 24,19.33 25.03,18.3 27.32,18.3 29.73,15.88 31.02,15.88 31.07,15.84 v1(31.46,15.84)
  BOTTOM w0.3: J3.3 v1(12.15,25.01)
RXD_D: length 30.7
  TOP w0.18: R10.1 31.45,17.88 31.27,18.06 v1(30.43,18.06) 29.54,18.06 29.25,17.77 U12.20
  TOP w0.22: v1(11.2,24.91) J1.3
  VCC w0.127: v1(30.43,18.06) 30.43,19.9 29.49,20.84 26.3,20.84 24.41,22.73 24.41,24.39 22.45,26.35 11.95,26.35 11.2,25.6 v1(11.2,24.91)
RXDA: length 17.5
  TOP w0.18: U11.17 15.25,9.4 16.55,8.1 23.97,8.1 25.8,9.93 25.8,13.3 26.24,13.75 U12.8
RXDB: length 11.6
  TOP w0.18: U11.27 20.25,9.89 20.98,9.17 23.42,9.17 24.78,10.53 24.78,13.61 25.92,14.75 U12.6
RXDC: length 3.9
  TOP w0.18: U11.39 24.12,14.25 25.62,15.75 U12.4
RXDD: length 10.7
  TOP w0.18: U11.52 21.25,20 21.12,20.13 21.12,20.71 21.53,21.11 22.86,21.11 24.06,19.92 25.77,19.92 26.26,19.43 26.26,18.19 26.54,17.91 27.53,17.91 27.75,17.69 U12.1
TXD_A: length 49
  TOP w0.2: v1(10.59,7.77) 10.91,7.44 J2.2
  TOP w0.22: U12.12 v1(30.78,13.25)
  VCC w0.127: 32.97,10.92 31.03,8.98 26.79,8.98 25.2,7.39 21.85,7.39 21.01,6.54 14.55,6.54 14.1,6.1 11.53,6.1 10.59,7.04 v1(10.59,7.77) ; 32.97,10.92 33.32,10.56 34.67,10.56 35.55,9.68 35.55,8.57 35.4,8.42 35.4,3.18 36.47,2.11 38.11,2.11 38.57,2.57 40.53,2.57 40.98,2.12 v1(41.59,2.12) ; 32.97,10.92 32.97,12.22 31.93,13.25 v1(30.78,13.25)
  BOTTOM w0.22: v1(41.59,2.12) 42.01,1.7 R99.1
TXD_B: length 40.6
  TOP w0.18: U12.14 v1(30.87,14.25)
  VCC w0.127: v1(12.91,7.73) 20.46,7.73 21.06,8.33 24.64,8.33 25.71,9.39 25.71,10.9 26.29,11.49 28.65,11.49 29.61,12.45 29.61,14.07 29.79,14.25 v1(30.87,14.25) 31.77,14.25 33.57,12.45 33.58,12.45 34.2,11.83 35.4,11.83 38.49,8.74 v1(43.86,8.74)
  BOTTOM w0.3: R79.1 v1(43.86,8.74) ; J4.2 12.46,7.28 v1(12.91,7.73)
TXD_C: length 43.5
  TOP w0.18: U12.16 v1(30.87,15.25)
  VCC w0.127: v1(32.74,16.18) 33.02,16.46 33.02,16.48 33.36,16.82 33.36,16.84 33.75,17.23 33.77,17.23 33.97,17.43 35.44,17.43 35.73,17.14 36.82,17.14 37.1,17.43 37.92,17.43 39.11,16.24 v1(43.83,16.24) ; v1(30.87,15.25) 29.37,15.25 26.85,17.78 24.48,17.78 23.33,18.92 23.33,20.13 21.72,21.74 20.02,21.74 17.71,24.05 10.83,24.05 10.4,24.47 v1(10.4,24.86)
  BOTTOM w0.22: v1(32.74,16.18) 31.89,15.33 30.95,15.33 v1(30.87,15.25)
  BOTTOM w0.3: J3.2 10.9,24.11 10.6,24.41 10.6,24.54 10.4,24.74 v1(10.4,24.86) ; R60.1 43.98,15.65 43.83,15.81 v1(43.83,16.24)
TXD_D: length 42.8
  TOP w0.18: v1(31.04,16.43) 30.86,16.25 U12.18
  TOP w0.22: J1.2 12.45,24.51 v1(12.92,24.98)
  VCC w0.127: v1(12.92,24.98) 13.79,25.85 21.6,25.85 23.47,23.98 23.47,22.43 24.66,21.23 24.66,20.35 25.05,19.96 26.05,19.96 26.45,20.36 28.93,20.36 29.53,19.76 29.53,16.9 30,16.43 v1(31.04,16.43) 31.04,17.33 32.24,18.53 35.44,18.53 39.51,22.6 v1(40.41,22.6)
  BOTTOM w0.3: R40.1 v1(40.41,22.6)
TXDA: length 20.3
  TOP w0.18: U11.16 14.22,11.25 13.84,10.87 13.84,9.65 15.96,7.54 24.37,7.54 26.31,9.48 26.31,12.96 26.6,13.25 U12.9
TXDB: length 12.6
  TOP w0.18: U12.7 26.1,14.25 25.27,13.43 25.27,10.16 23.77,8.65 20.76,8.65 19.75,9.65 U11.26
TXDC: length 3.9
  TOP w0.18: U12.5 25.76,15.25 24.26,13.75 U11.38
TXDD: length 5.4
  TOP w0.18: U11.48 24.12,18.75 24.28,18.59 24.28,16.73 24.76,16.25 U12.3
N00582: length 8.4
  TOP w0.18: v1(18.81,21.73) 16.29,21.73 15.75,21.19 U11.63
  TOP w0.2: v1(18.81,21.73) 18.81,22.16 19.05,22.41 R5.1
  BOTTOM w0.2: v1(18.81,21.73) 19.36,21.73 19.48,21.62 U22.5
N00604: length 5.6
  TOP w0.18: v1(16.52,20.78) 16.25,20.51 U11.62
  BOTTOM w0.2: v1(16.52,20.78) 16.52,20.83 16.72,21.03 R44.1 18.34,21.03 18.46,21.16 19.14,21.16 19.63,20.67 U22.4
N00616: length 14.1
  TOP w0.18: U11.61 16.75,20.13 17.67,21.05 18.37,21.05 18.49,21.16 20.6,21.16 20.95,21.52 21.62,21.52 21.87,21.77 23.28,21.77 24.52,20.53 v1(25.5,20.53)
  BOTTOM w0.36: R46.2 v1(25.5,20.53) 25.22,20.25 24.06,20.25 23.64,20.67 U22.3
N00760: length 3
  BOTTOM w0.28: U22.1 23.78,22.57 23.87,22.66 R37.1
  BOTTOM w0.36: R37.1 R46.1
N01302: length 9.1
  TOP w0.22: 8.59,15.25 U10.6 ; 8.59,15.25 U11.8 ; 8.59,15.25 8.79,15.05 8.79,14.64 8.41,14.25 U10.8
N01314: length 9.7
  TOP w0.22: U10.7 6.75,14.75 6.5,15 6.5,15.56 6.69,15.75 U10.5 U11.7
N01942: length 1.9
  TOP w0.26: v1(22.52,18.72) 22.75,18.95 U11.49
  BOTTOM w0.35: v1(22.52,18.72) 22.49,18.7 22.21,18.7 21.92,18.4 R49.1
N02617: length 2
  TOP w0.25: U11.6 v1(15.37,16.25)
  BOTTOM w0.4: R56.2 15.95,16.25 15.94,16.25 v1(15.37,16.25)
N02788: length 6.8
  TOP w0.25: v1(15.62,11.82) 15.2,12.25 U11.14
  BOTTOM w0.3: R70.1 19.02,11.6 18.67,11.95 16.86,11.95 16.59,11.68 C55.2 15.97,11 15.62,11.35 v1(15.62,11.82)
N03863: length 4.8
  TOP w0.25: v1(15.42,14.76) 15.4,14.75 U11.9
  BOTTOM w0.25: C45.2 14.95,14.29 v1(15.42,14.76) 15.57,14.91 C44.2 16.49,14.32 16.48,14.32 L2.2
N03880: length 5.9
  TOP w0.25: U11.4 v1(15.28,17.25)
  BOTTOM w0.35: v1(15.28,17.25) 15.63,17.61 L1.2
  BOTTOM w0.4: 14.89,17.25 14.25,17.88 C34.2 C41.2 14.25,16.57 14.89,17.21 14.89,17.25 ; 14.89,17.25 v1(15.28,17.25)
N15178: length 5.8
  TOP w0.25: U12.19 v1(30.2,17.2)
  BOTTOM w0.35: v1(30.2,17.2) 29.58,17.2 29.48,17.11 C38.1 28.99,16.11 29.23,15.87 ; R62.1 29.23,15.87 ; 29.23,15.87 R61.1
N619829: length 2.6
  TOP w0.25: v1(13.39,12.5) 13.61,12.5 13.87,12.75 U11.13
  BOTTOM w0.25: R69.2 12.53,12.13 12.89,12.5 v1(13.39,12.5)
N625108: length 5.7
  TOP w0.4: PD1.1 v1(20.96,24.8) 21.31,24.8 21.41,24.7 U1.4
  BOTTOM w0.38: v1(20.96,24.8) 20.96,25.46 21.2,25.7 R29.1 C18.1
N625141: length 6.2
  TOP w0.4: C1.1 24.8,27.8 24.5,27.5 U1.1 v1(23.8,28.53)
  BOTTOM w0.38: v1(23.8,28.53) 23.8,27.49 23.5,27.19 C18.2 R29.2
N797485: length 3.3
  TOP w0.3: U2.4 27.7,25.72 28.05,26.07 v1(28.39,26.07)
  BOTTOM w0.38: R27.2 v1(28.39,26.07) R26.2
N797493: length 6
  TOP w0.3: U2.1 29.6,28.4 29.34,28.66 v1(28.2,28.66)
  TOP w0.4: C2.2 30.51,27.6 30.41,27.5 U2.1
  BOTTOM w0.38: v1(28.2,28.66) 27.66,28.13 R27.1
N797585: length 8.3
  TOP w0.36: U3.1 v1(34.8,28.61)
  BOTTOM w0.3: R34.1 36.2,25.6 36.21,25.61 R28.2 36.21,27.09 36.2,27.11 C13.1
  BOTTOM w0.36: C13.1 36.2,28.33 35.91,28.61 v1(34.8,28.61) R30.2
N797593: length 7.5
  TOP w0.3: R2.1 36,26.8 35.3,26.1 34.3,26.1 33.85,25.65 U3.5 v1(33.85,23.67)
  BOTTOM w0.36: R30.1 34.8,24.62 v1(33.85,23.67)
N797877: length 3.6
  TOP w0.3: U3.3 32.9,26.71 32.79,26.6 C2.1
  TOP w0.4: C2.1 R4.1
N797953: length 4
  TOP w0.4: R3.1 25.39,25.89 25.4,25.9 C1.2 26.28,26.8 26.98,27.5 U2.3
N798113: length 5.6
  TOP w0.127: R3.2 25.4,24.4
  TOP w0.4: 25.4,24.4 v1(26.51,24.4)
  BOTTOM w0.38: C23.1 26.71,24.2 v1(26.51,24.4) 26.51,24.98 26.09,25.4 R32.1
  BOTTOM w0.4: R24.2 R32.1
N804959: length 1.7
  BOTTOM w0.38: R26.1 29.84,27.07 30.11,26.8 C14.1
N809789: length 6.8
  TOP w0.3: 39.38,26.15 39.35,26.12 U4.2 ; 39.38,26.15 40.37,26.15 40.53,25.98 v1(41.01,25.98) ; 39.38,26.15 37.75,26.15 37.4,25.8 R2.2
  BOTTOM w0.3: R25.1 40.62,26.37 v1(41.01,25.98)
N814486: length 6.2
  TOP w0.3: U4.4 v1(40.3,28.62)
  BOTTOM w0.2: R33.2 39.9,25.71 39.67,25.94 39.67,27.46 40,27.79 R25.2 40.62,28.29 v1(40.3,28.62)
N820703: length 2.4
  BOTTOM w0.22: C68.1 30.65,4.55 30.44,4.76 30.44,5.34 30.22,5.56 R84.1
N820707: length 5.7
  TOP w0.4: U19.4 27.7,3.42 28.1,3.82 v1(29.63,3.82)
  BOTTOM w0.35: R85.2 R84.2 v1(29.63,3.82)
N820719: length 6.3
  TOP w0.25: U19.1 30.09,5.29 30.34,5.54 C10.2
  TOP w0.38: U19.1 v1(29.6,6.38)
  BOTTOM w0.26: R85.1 27.67,6.05 27.66,6.06 27.66,6.57 27.96,6.87 29.5,6.87 29.6,6.77 v1(29.6,6.38)
N820731: length 7.8
  TOP w0.38: U20.1 v1(34.8,6.22)
  BOTTOM w0.3: R89.2 36.21,4.55 36.2,4.56 C67.1 36.2,5.55 35.52,6.22 v1(34.8,6.22) R90.2
  BOTTOM w0.35: R96.1 36.2,3.36 36.21,3.37 R89.2
N820747: length 5.7
  TOP w0.4: U18.4 v1(20.99,2.49) 20.49,2.49 20.44,2.54 PD4.1
  BOTTOM w0.35: C71.1 22.6,3.39 22.59,3.39 R91.1 21.28,3.39 20.99,3.11 v1(20.99,2.49)
N820755: length 13.7
  TOP w0.4: C11.1 24.81,5.52 24.58,5.29 U18.1 v1(23.8,6.38)
  BOTTOM w0.26: R92.2 27.09,3.15 26.56,3.69 26.56,6.23 25.78,7.01 24.16,7.01 23.8,6.66 v1(23.8,6.38) 23.8,5.62 23.5,5.32 C71.2
  BOTTOM w0.38: R91.2 22.9,4.39 22.91,4.39 C71.2
N820875: length 8.5
  TOP w0.38: U20.5 v1(33.85,3.42)
  BOTTOM w0.25: R95.1 38.62,1.78 38.04,1.2 35.72,1.2 34.8,2.12 R90.1 33.86,3.41 v1(33.85,3.42)
N821237: length 3.7
  TOP w0.38: v1(39.62,3.72) 39.35,3.45 U21.2
  BOTTOM w0.25: R95.2 39.62,3.72 v1(39.62,3.72)
  BOTTOM w0.3: R87.1 40.62,4.09 40.26,3.72 v1(39.62,3.72)
N821249: length 2.8
  TOP w0.3: U21.4 40.3,5.6 40.62,5.92 v1(40.62,6.05) 40.62,6.17 40.85,6.4 R20.2
  BOTTOM w0.3: R87.2 v1(40.62,6.05)
N821327: length 11.8
  TOP w0.25: C10.1 31.96,4.54 32.2,4.78 32.2,5.08 32.41,5.29 U20.3
  TOP w0.3: U20.3 v1(32.9,6.34)
  BOTTOM w0.2: R83.1 33.57,5.56 33.77,5.36 33.77,4.2 33.1,3.52 30.32,3.52 29.95,3.15 R92.1
  BOTTOM w0.3: v1(32.9,6.34) 32.9,6.22 32.85,6.17 R83.1
N821379: length 3.9
  TOP w0.4: U19.3 26.88,5.29 26.11,4.52 C11.2 25.4,3.72 25.39,3.71 R22.1
N821555: length 5.5
  TOP w0.4: v1(26.41,2.22) 26.41,2.22 R22.2
  BOTTOM w0.25: C74.1 26.83,1.8 v1(26.41,2.22) 26.41,2.93 26.12,3.22 R94.1
  BOTTOM w0.35: R94.1 R86.2
N830568: length 14.4
  TOP w0.4: C75.2 9.74,10.6 9.73,10.61 v1(9.73,11) R16.2 v1(8.94,11.86)
  TOP w0.6: C76.2 6.42,6.51 v1(5.4,5.49)
  VCC w0.25: v1(5.4,5.49) 5.92,5.49 6.65,6.21 6.65,7.92 v1(9.73,11)
  BOTTOM w0.4: v1(3.66,5.68) 3.6,5.74 C66.2
  vias: v1(4.87,5.84)
N884584: length 6.8
  TOP w0.26: R6.1 8.02,20.81 8.74,20.09 8.74,16.51 8.47,16.25 U10.4
N886048: length 2.2
  TOP w0.25: U10.10 R13.1
N887669: length 6
  TOP w0.2: U11.2 13.87,18.25 13.63,18.49 13.63,19.59 13.12,20.1 Y1.3
  TOP w0.25: Y1.3 12.06,21.4 11.84,21.62 C5.2
N887689: length 8.5
  TOP w0.2: U11.3 13.55,17.75 13.07,18.23 13.07,18.85 12.82,19.1 10.37,19.1 10.06,18.79 Y1.1
  TOP w0.25: C6.2 10.23,16.61 10.06,16.78 Y1.1
N909852: length 16.3
  TOP w0.3: v1(40.99,10.64) 41.05,10.64 41.55,10.14 R17.2
  TOP w0.36: C9.1 32.32,10.6 32.19,10.73 U15.1 31.7,11.64 v1(31.69,11.65)
  BOTTOM w0.22: v1(40.99,10.64) 39.44,10.64 38.66,11.41 32.62,11.41 32.38,11.65 v1(31.69,11.65)
  BOTTOM w0.3: v1(31.69,11.65) 31.46,11.43 C56.2 30.87,10.62 30.69,10.43 R75.2
N909860: length 11
  TOP w0.3: v1(43.76,13.81) 43.42,14.15 U14.3 ; C8.1 39.86,9.7 v1(39.93,9.76) R17.1
  TOP w0.4: C8.1 39.27,8.94 39.27,8.94 R18.1
  VCC w0.127: v1(43.76,13.81) 43.37,13.81 43.29,13.72 42.53,13.72 41.86,13.06 41.86,10.13 41.5,9.76 v1(39.93,9.76)
N909984: length 1.4
  BOTTOM w0.38: C57.1 35.66,10.6 35.68,10.62 R72.1
N909988: length 3.6
  TOP w0.3: 35.65,7.6 35.65,8.45 v1(36.19,9)
  BOTTOM w0.3: R72.2 36.19,9.54 v1(36.19,9)
  BOTTOM w0.38: R73.2 37.03,9.61 37.02,9.62 R72.2
N910000: length 2.7
  TOP w0.38: U16.1 38.16,10.4 v1(38.45,10.7) C8.2
  BOTTOM w0.38: R73.1 37.71,10.7 v1(38.45,10.7)
N910012: length 8
  TOP w0.4: U14.1 v1(42.7,11.4)
  BOTTOM w0.3: R64.1 R63.2 41.78,13.51 41.51,13.25 41.51,12.27 ; 41.51,12.27 41.33,12.1 R67.2 ; 41.51,12.27 41.75,12.03 41.96,12.03 41.96,12.03 C52.1 42.62,11.54 42.7,11.46 v1(42.7,11.4)
N910028: length 6.1
  TOP w0.4: 29.8,7.93 29.75,7.98 v1(28.93,7.98)
  BOTTOM w0.127: 27.54,7.98 PD3.1
  BOTTOM w0.3: C56.1 30.67,9.62 30.49,9.43 30.48,9.43 R75.1 29.3,9.43 28.92,9.06 28.92,8.99 28.93,8.98 v1(28.93,7.98) PD3.1
N910156: length 4.2
  TOP w0.26: R15.1 38.77,12.7 38.99,12.91 38.99,13.08 39.11,13.2 U14.5 v1(40.83,13.2)
  BOTTOM w0.26: R67.1 40.27,13.1 40.37,13.2 v1(40.83,13.2)
N910546: length 4.7
  TOP w0.26: R15.2 37.69,13.7 v1(37.39,13.4) 37.19,13.2 U13.2
  BOTTOM w0.3: v1(37.39,13.4) 36.34,13.4 35.6,14.13 R65.1
N910558: length 3
  TOP w0.26: U13.4 33.58,14.15 33.17,13.75 v1(33.02,13.75) R12.2
  BOTTOM w0.3: v1(33.02,13.75) 33.41,14.13 R65.2
N910688: length 3.8
  TOP w0.38: R19.1 33.39,8.9 33.4,8.91 C9.2 34.24,9.6 35.05,10.4 U16.3
N910864: length 5.1
  TOP w0.38: R19.2 34.37,7.41 v1(34.51,7.55)
  BOTTOM w0.3: R80.1 33.41,8.91 33.39,8.93 R71.2
  BOTTOM w0.4: C64.1 v1(34.51,7.55) 34.51,7.96 34.05,8.42 R80.1
N911060: length 1.4
  BOTTOM w0.36: C24.1 35.68,22.75 35.68,22.74 R41.1
N911064: length 3.9
  TOP w0.38: v1(36.26,20.94) 36.07,20.94 35.65,20.52 U6.4
  BOTTOM w0.38: R41.2 36.27,20.95 v1(36.26,20.94) R45.2
N911076: length 3
  TOP w0.36: C3.2 v1(38.35,22.58) 38.29,22.58 38.08,22.37 U6.1
  BOTTOM w0.36: v1(38.35,22.58) 37.79,22.58 37.62,22.42 R45.1
N911088: length 8.1
  TOP w0.26: U9.1 41.91,15.83 41.79,15.71 v1(41.3,15.71)
  BOTTOM w0.127: C40.1 42.61,15.7
  BOTTOM w0.26: v1(41.3,15.71) 41.69,15.71 41.7,15.7 42.61,15.7 ; v1(41.3,15.71) 41.3,16.24 41.54,16.48 41.54,16.99 41.78,17.22 R51.2 ; v1(41.3,15.71) R57.2
  BOTTOM w0.4: R52.1 R51.2
N911104: length 6.8
  TOP w0.36: 29.8,19.27 28.98,19.27 v1(28.93,19.32) PD2.1
  BOTTOM w0.36: C27.1 31.04,21.32 31.03,21.32 R43.1 29.21,21.32 28.91,21.02 28.91,19.56 28.93,19.54 v1(28.93,19.32)
N911112: length 5.6
  TOP w0.36: C4.1 32.62,22.5 32.19,22.07 U7.1 v1(31.7,23.16)
  BOTTOM w0.36: C27.2 31.04,22.32 31.03,22.32 R43.2
  BOTTOM w0.4: C27.2 31.63,23.09 v1(31.7,23.16)
N911232: length 4.1
  TOP w0.26: U9.5 v1(40.81,16.78)
  TOP w0.3: R11.1 38.75,16.27 39.25,16.78 U9.5
  BOTTOM w0.26: R57.1 40.25,16.71 40.31,16.78 v1(40.81,16.78)
N911614: length 4.7
  TOP w0.3: U8.2 v1(37.35,16.78) 37.37,16.78 37.87,17.27 R11.2
  BOTTOM w0.3: R53.1 35.87,17.73 36.82,16.78 v1(37.35,16.78)
N911626: length 2.8
  TOP w0.3: R10.2 v1(33.08,17.29) 33.52,17.73 34.02,17.73
  BOTTOM w0.3: v1(33.08,17.29) 33.51,17.73 R53.2
N911704: length 6.9
  TOP w0.3: 42.7,17.73 42.7,19.62 41.98,20.34 R8.1 40.04,20.34 40.02,20.36 39.32,20.36 39.15,20.52 C3.1
N911756: length 3.9
  TOP w0.36: U6.3 35.05,22.37 34.17,21.5 C4.2 33.4,20.74 33.39,20.74 R9.1
N911932: length 6
  TOP w0.36: R9.2 v1(34.47,19.21)
  BOTTOM w0.36: C30.1 35.31,19.53 34.98,19.21 v1(34.47,19.21) 34.47,19.88 34.12,20.23 R48.1 R42.2
N931488: length 24.6
  TOP w0.38: v1(53.04,6.3) 51.43,6.3 50.92,5.79 50.92,2.98 50.24,2.31 45.78,2.31 45.4,2.69 LD4.1
  TOP w0.4: LD4.1 44.16,3.8 42.86,5.1 R21.2
  BOTTOM w0.38: R82.1 53.09,6.25 v1(53.04,6.3)
  BOTTOM w0.5: C65.1 C70.1 44.44,4.49 45.13,3.8 LD4.1 45.4,2.86 45.8,2.46 R98.1 46.63,1.69 46.64,1.7 R97.1
N931500: length 22.8
  TOP w0.3: v1(46.2,22.6) 46.54,22.26 51.63,22.26 52.57,23.2 52.57,26.8 v1(53.07,27.3)
  TOP w0.4: LD1.1 44.06,24.9 42.85,26.11 R1.2
  BOTTOM w0.3: R23.1 v1(53.07,27.3)
  BOTTOM w0.5: C17.1 C19.1 44.15,25.4 44.65,24.9 LD1.1 45.4,23.74 45.6,23.54 R38.1 v1(46.2,22.6) R39.1
N931812: length 6.4
  BOTTOM w0.38: Q7.3 49.63,6.83 49.01,7.45 45.87,7.45 45.4,6.98 LD4.2
N931828: length 6.3
  BOTTOM w0.36: LD1.2 45.4,28.21 45.7,28.51 48.8,28.51 49.36,27.94 Q1.3
N931856: length 13
  TOP w0.38: v1(52.34,3.45) 52.34,2.94 50.74,1.33 44.45,1.33 v1(44.08,1.7)
  BOTTOM w0.38: Q8.1 v1(52.34,3.45)
  BOTTOM w0.5: R98.2 44.31,1.69 44.3,1.7 v1(44.08,1.7) R99.2 43.4,2.29 43.41,2.3 R93.1
N931860: length 2.5
  BOTTOM w0.5: Q8.3 49.63,2.35 48.98,1.7 R97.2
N931876: length 12.5
  TOP w0.3: v1(51.61,24.54) 51.61,24.07 50.85,23.3 v1(43.41,23.3)
  BOTTOM w0.36: v1(51.61,24.54) 51.61,24.82 51.91,25.12 Q2.1
  BOTTOM w0.5: R38.2 R40.2 43.4,23.19 43.41,23.2 v1(43.41,23.3) R35.1
N931880: length 2.7
  BOTTOM w0.5: Q2.3 49.36,23.36 48.6,22.6 R39.2
N931892: length 3.3
  BOTTOM w0.5: Q7.1 53.62,7.23 53.63,7.25 R82.2 54.82,7.25 54.83,7.26 R81.1
N931896: length 5.7
  BOTTOM w0.3: Q1.1 52.89,28.22 52.97,28.3 R23.2
  BOTTOM w0.36: R31.1 54.5,26 54.89,26.39 54.89,28.02 54.61,28.3 R23.2
N932124: length 8.7
  BOTTOM w0.38: Q8.2 51.39,2.12 50.98,2.53 50.98,4.87 51.43,5.32 Q7.2
  BOTTOM w0.5: Q8.2 53.67,2.12 54.23,2.68 R88.1
N932164: length 7.2
  BOTTOM w0.36: Q1.2 51.15,26.31 50.65,25.81 50.65,23.71 51.15,23.21 Q2.2 53.12,23.21 53.31,23.4 R36.1
N932344: length 24
  TOP w0.36: v1(55.42,13.28) 53.76,13.28 52.92,12.44 52.92,9.93 52.49,9.5 48.06,9.5 47.64,9.93 LD3.1
  TOP w0.4: LD3.1 46.13,10.98 45.02,12.1 R14.2
  BOTTOM w0.36: R66.1 v1(55.42,13.28)
  BOTTOM w0.5: C50.1 C54.1 46.21,11.47 46.7,10.98 LD3.1 47.64,9.93 48.04,9.53 R78.1 48.53,8.73 48.54,8.74 R77.1
N932356: length 24.3
  TOP w0.36: v1(54.88,20.27) 53.3,20.27 52.35,19.32 52.35,16.52 51.99,16.16 48.03,16.16 47.59,16.59 LD2.1
  TOP w0.4: R7.2 45.02,18.86 46.23,17.65 LD2.1
  BOTTOM w0.3: R47.1 55.1,20.05 v1(54.88,20.27)
  BOTTOM w0.5: R59.1 R58.1 47.99,16.24 47.59,16.64 LD2.1 46.87,17.65 46.69,17.83 46.69,17.87 46.21,18.35 C35.1 C29.1
N932668: length 5.9
  BOTTOM w0.36: LD3.2 47.64,14.02 48.12,14.5 51.01,14.5 51.6,13.91 Q5.3
N932684: length 6.1
  BOTTOM w0.36: LD2.2 47.59,20.85 48.08,21.33 50.98,21.33 51.55,20.77 Q3.3
N932712: length 13.4
  TOP w0.36: v1(46.31,8.73) 46.72,8.32 53.42,8.32 54.3,9.2 v1(54.3,10.72)
  BOTTOM w0.5: v1(54.3,10.72) Q6.1 ; R74.1 45.6,9.34 45.59,9.33 R79.2 46.3,8.74 v1(46.31,8.73) R78.2
